# EAGLE board RS233_BRD (EAGLE 7.6.0)
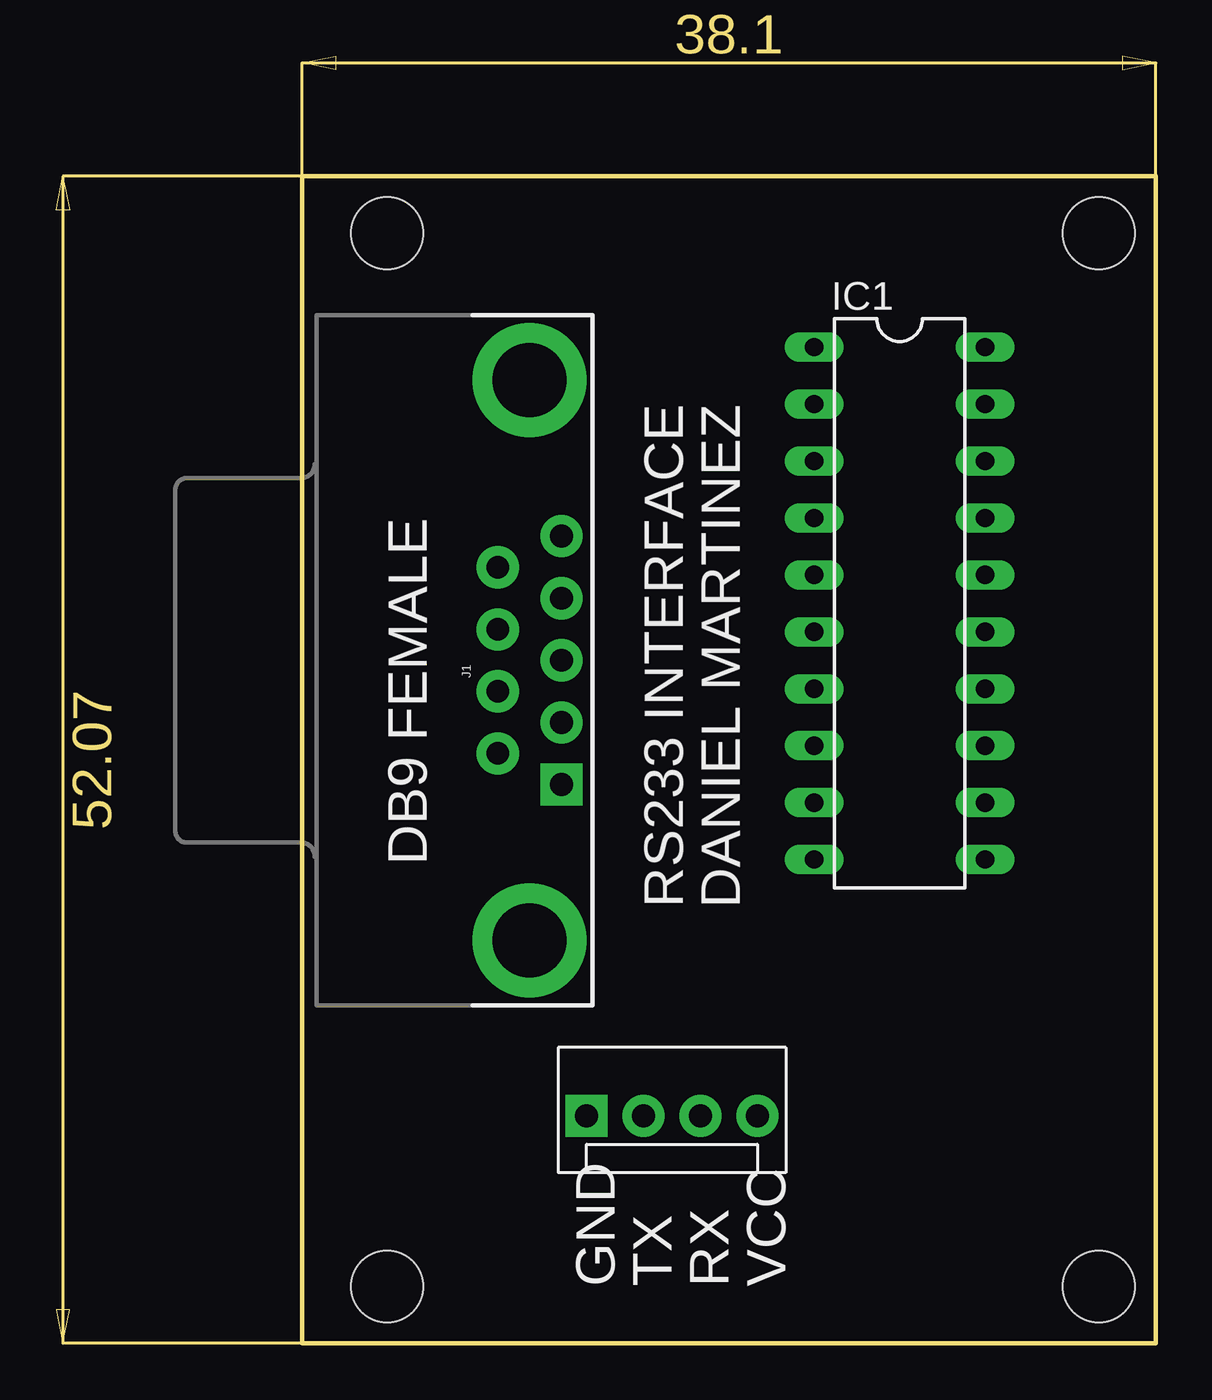
[diagram p0: board, top side]
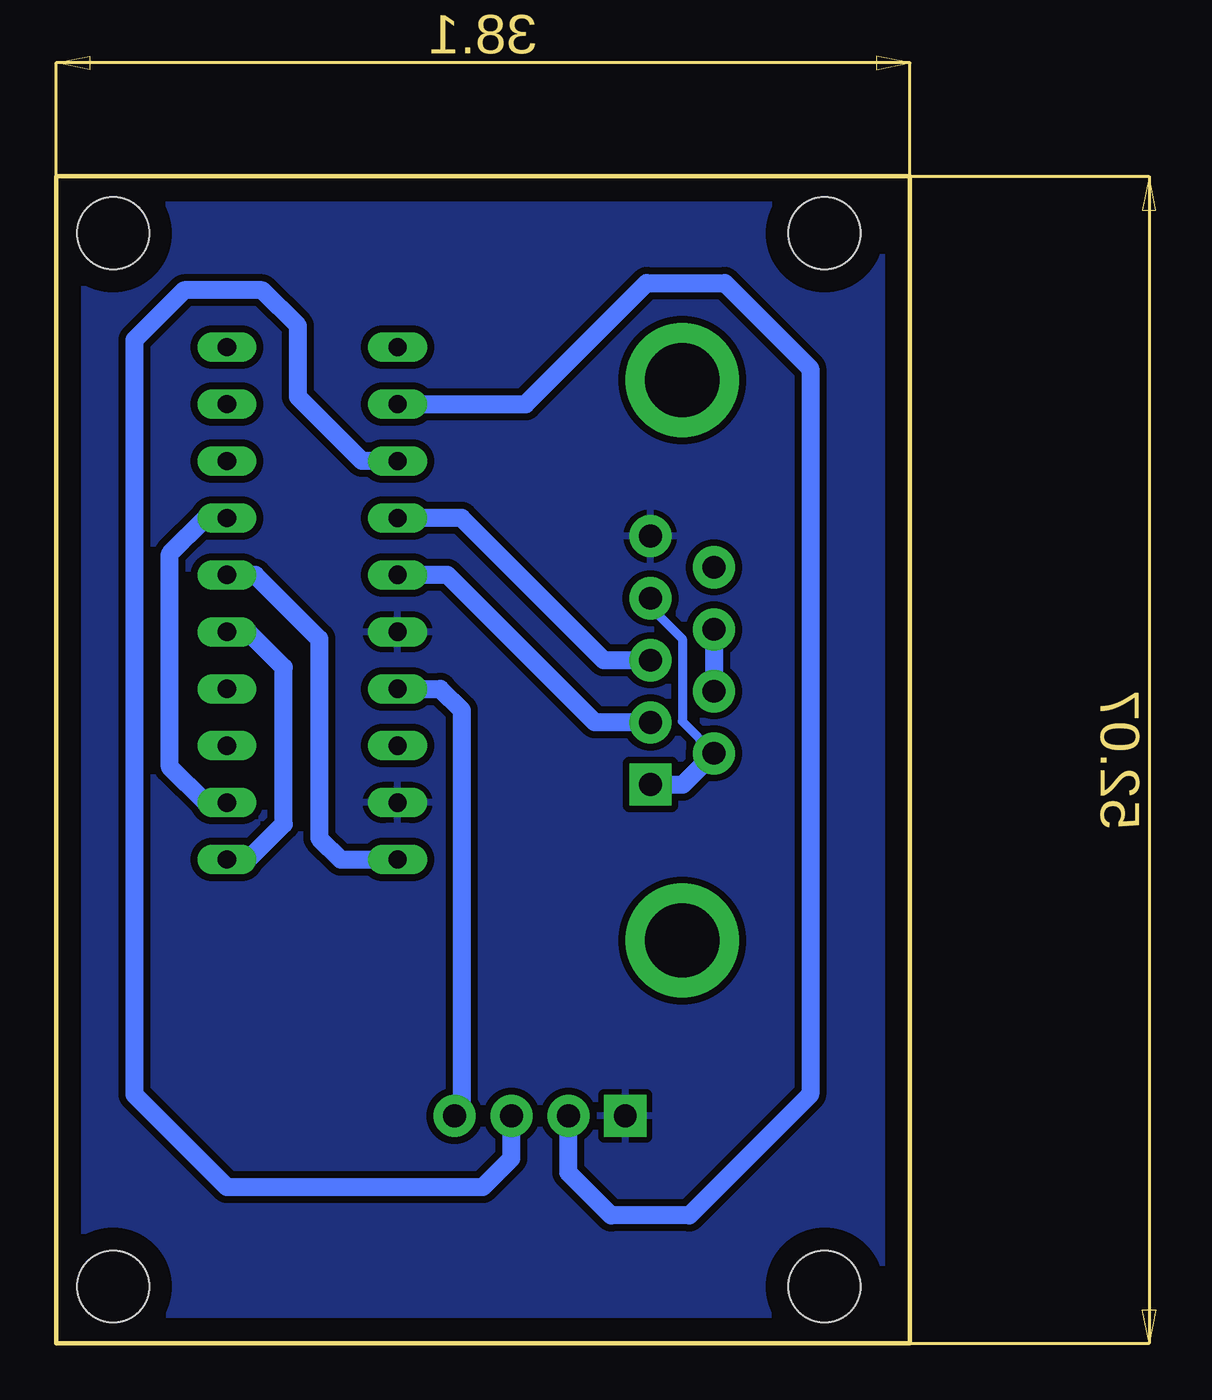
[diagram p1: board, bottom side, seen from below]

Size 38.1 x 52.07 mm. Coordinates in mm from the lower left corner, seen from the top.
Outline: 0,0 38.1,0 38.1,52.07 0,52.07 0,0
Copper layers (1*16): Top 0.035mm / dielectric 1.5mm / Bottom 0.035mm
Design rules "default": minimum track width 10mil, minimum drill 24mil, track to track 8mil, track to pad 8mil, pad to pad 8mil, via to via 8mil, smd to smd 8mil, copper to edge 40mil, drill to drill 8mil, minimum pad ring 10mil, minimum via ring 8mil, stop-mask expansion 4mil, vias tented up to drill 0mil, thermal gap 10mil
Holes 3.2 mm at 3.81,49.53 35.56,49.53 3.81,2.54 35.56,2.54

## Footprints (pad centres in the part's own frame; a part is rotated, then mirrored left to right if it is on the bottom)
DIL20 = drill 0.813 long: 1 -11.43,-3.81; 2 -8.89,-3.81; 3 -6.35,-3.81; 4 -3.81,-3.81; 5 -1.27,-3.81; 6 1.27,-3.81; 7 3.81,-3.81; 8 6.35,-3.81; 9 8.89,-3.81; 10 11.43,-3.81; 11 11.43,3.81; 12 8.89,3.81; 13 6.35,3.81; 14 3.81,3.81; 15 1.27,3.81; 16 -1.27,3.81; 17 -3.81,3.81; 18 -6.35,3.81; 19 -8.89,3.81; 20 -11.43,3.81
DB9 = drill 1.016 pad 1.88 square: 1 -5.54,-1.42 | drill 1.016 pad 1.88: 2 -2.77,-1.42; 3 0,-1.42; 4 2.77,-1.42; 5 5.54,-1.42; 6 -4.15,1.42; 7 -1.38,1.42; 8 1.38,1.42; 9 4.15,1.42 | drill 3.302 pad 5.08: G1 -12.5,0; G2 12.5,0
MOLEX-1X4 = drill 1.016 pad 1.88 square: 1 0,0 | drill 1.016 pad 1.88: 2 2.54,0; 3 5.08,0; 4 7.62,0

## Placement (x,y rotation side)
FRAME1  FRAME-LETTER  [CREATIVE_COMMONS]  44.45,-21.59 0 top  (outside the outline)
IC1  MAX233  [DIL20]  26.67,33.02 270 top
J1  DB 9 Female  [DB9]  10.16,30.48 90 top
J2  MOLEX 4x1  [MOLEX-1X4]  12.7,10.16 0 top

## Library data of the parts
FRAME1 = SparkFun-Aesthetics
IC1 = maxim; MPN: MAX233ACPP+G36; OC_FARNELL: 1593332; OC_NEWARK: 89K3459
J1 = SparkFun-Connectors; PROD_ID: CONN-08194
J2 = SparkFun-Connectors

## Nets
GND: IC1.6 IC1.9 J1.5 J2.1
N$1: IC1.11 IC1.15
N$2: IC1.10 IC1.16
N$3: J1.7 J1.8
N$4: J1.1 J1.4 J1.6
N$5: IC1.12 IC1.17
RX: IC1.3 J2.3
RX_PC: IC1.4 J1.3
TX: IC1.2 J2.2
TX_PC: IC1.5 J1.2
VCC: IC1.7 J2.4

## Tracks (layer width: path | path; a pad name or v marks a point on that pad's centre or on a via)
GND
  pour Bottom (isolate 0.305): 0,52.07 38.1,52.07 38.1,0 0,0
N$1
  Bottom 0.813: IC1.11 29.53,21.59 27.94,23.18 27.94,30.16 29.53,31.75 IC1.15
N$2
  Bottom 0.813: IC1.16 29.21,34.29 26.35,31.43 26.35,22.54 25.4,21.59 IC1.10
N$3
  Bottom 0.813: J1.8 J1.7
N$4
  Bottom 0.406: J1.4 11.58,32.85 10.16,31.43 10.16,27.75 J1.6
  Bottom 0.813: J1.1 10.13,24.94 J1.6
N$5
  Bottom 0.813: IC1.17 31.43,36.83 33.02,35.24 33.02,25.72 31.43,24.13 IC1.12
RX
  Bottom 0.813: IC1.3 24.45,39.37 27.3,42.23 27.3,45.4 28.89,46.99 32.38,46.99 34.61,44.77 34.61,11.11 30.48,6.98 19.05,6.98 17.78,8.25 J2.3
RX_PC
  Bottom 0.813: J1.3 13.65,30.48 20,36.83 IC1.4
TX
  Bottom 0.813: IC1.2 17.14,41.91 11.75,47.31 8.25,47.31 4.44,43.5 4.44,11.11 9.84,5.71 13.34,5.71 15.24,7.62 J2.2
TX_PC
  Bottom 0.813: J1.2 14.06,27.71 20.64,34.29 IC1.5
VCC
  Bottom 0.813: IC1.7 20.95,29.21 20,28.26 20,10.48 J2.4

## Text on the board
tPlace: RS233 INTERFACE | DANIEL MARTINEZ | DB9 FEMALE | GND | TX | RX | VCC